# Altium PCB DHT11_PCB.PcbDoc
Units mm, origin at the board's own origin, x right, y up, seen from the top; angles counter-clockwise.
Board outline 40 x 18.5 mm, 2 copper layers (Top Layer, Bottom Layer), stack 1.571 mm thick; 5 components, 4 nets, 17 pads, 1 vias.
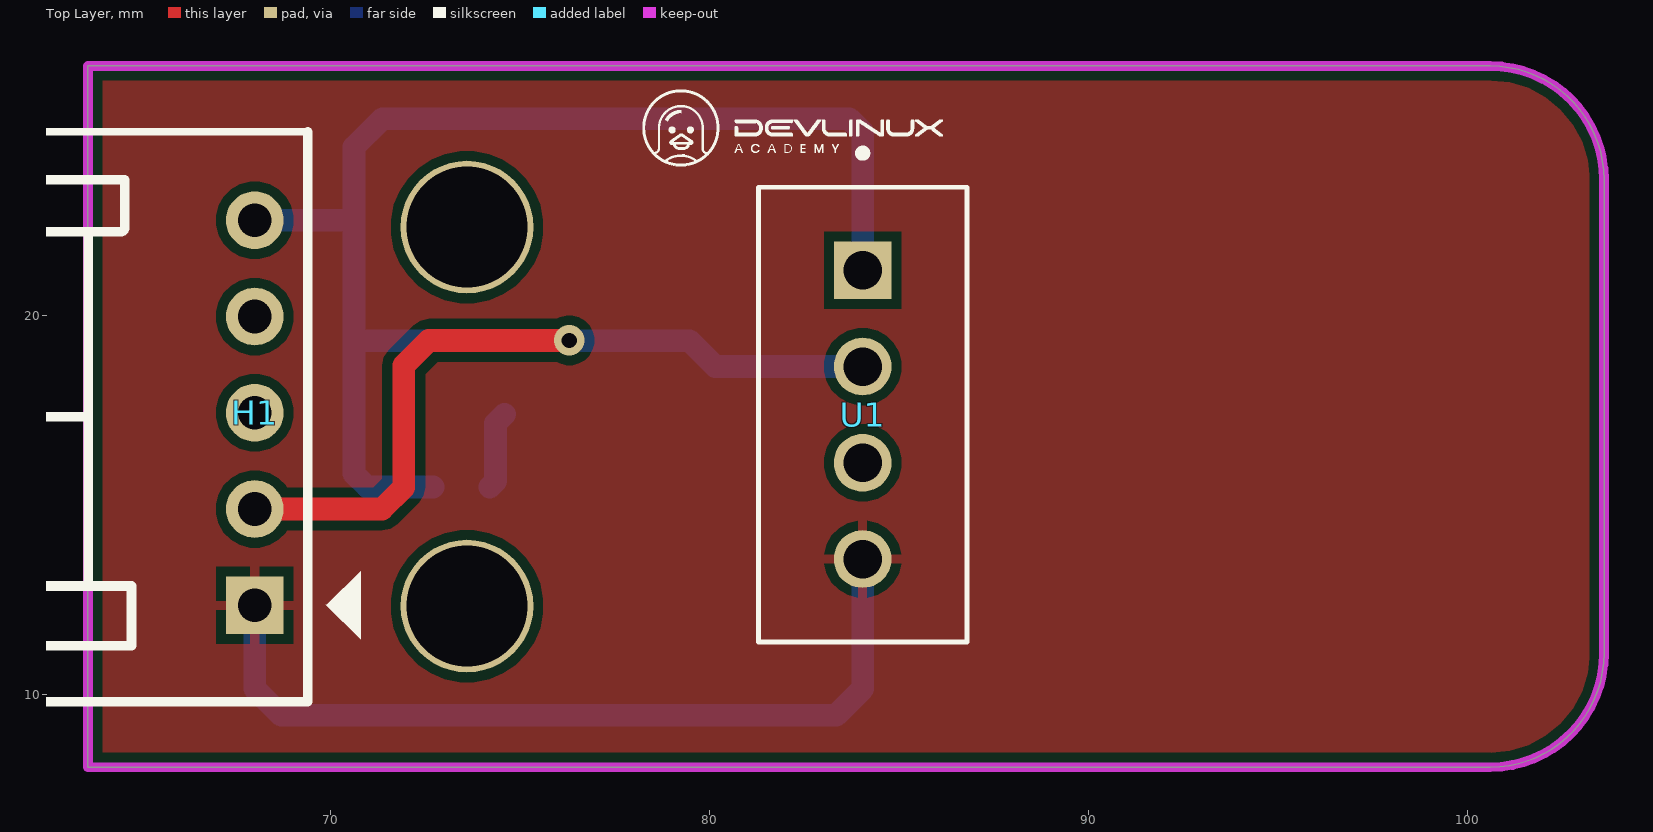
[diagram p0: Top Layer view]
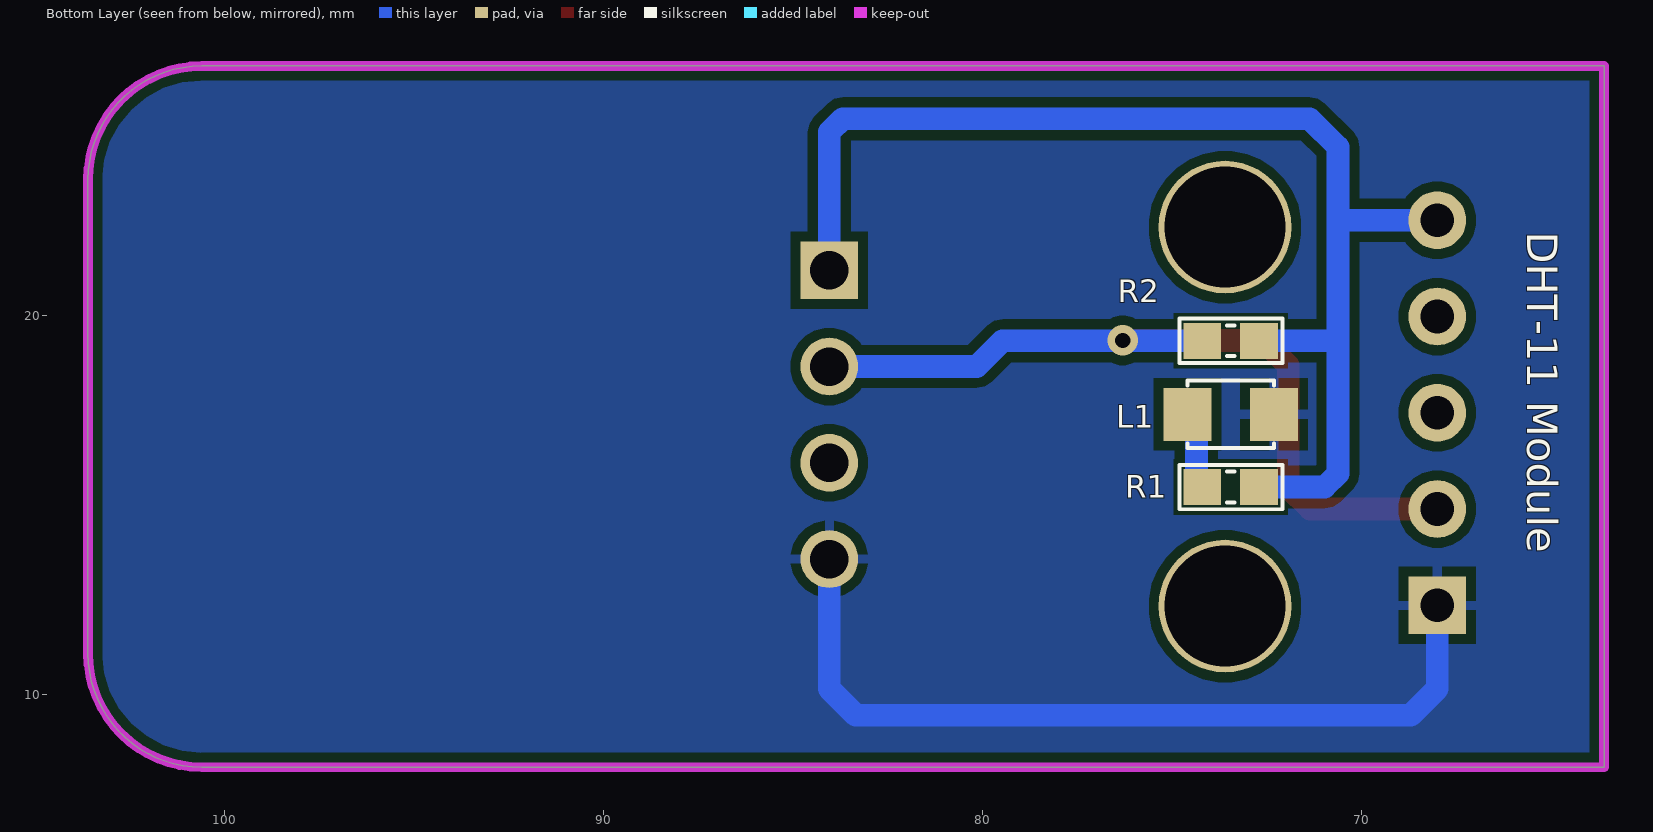
[diagram p1: Bottom Layer view, seen from below]
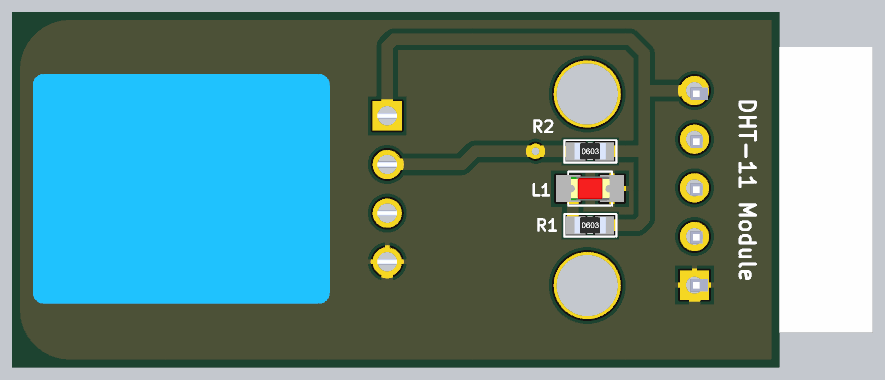
[diagram p2: 3D render of the assembled board from below, using the file's embedded part models]

## Layer stack, top to bottom
Top Solder: solder mask 0.0102, Solder Resist, Dk 3.5
Top Layer: signal copper 0.0356
Dielectric 1: dielectric 1.5, FR-4, Dk 4.8
Bottom Layer: signal copper 0.0356
Bottom Solder: solder mask 0.0102, Solder Resist, Dk 3.5

## Board outline
63.61,8.08 63.61,26.58 100.61,26.58 cw(c100.61,23.58) 103.61,23.58 103.61,11.08 cw(c100.61,11.08) 100.61,8.08

## Design rules (kind name [scope] priority, off if disabled: settings)
Clearance [All] p1: gap=0.254 ignorepadtopadclearanceinfootprint=FALSE except(0: Arc-Hole Track-Hole SMDPad-Hole THPad-Hole Via-Hole Fill-Hole Poly-Hole Region-Hole Text-Hole)
PolygonConnect [All] p1: connectstyle=Relief reliefconductorwidth=0.254 reliefentries=4 polygonreliefangle="90 Angle" airgapwidth=0.254
RoomDefinition DHT11_SCH [InComponentClass('DHT11_SCH')] p1: confinementstyle=ConfineIn formatcopy=TRUE lockcomponents=FALSE outline 164.363,-8.356 208.305,-8.356 208.305,18.06 164.363,18.06
RoutingVias [All] p1: holewidth=0.4 width=0.6 viastyle="Through Hole" minholewidth=0.3 minwidth=0.8 maxholewidth=0.5 maxwidth=1
SolderMaskExpansion [All] p1: expansion=0.102 istentingtop=FALSE
Width [All] p1: maxlimit=0.6 minlimit=0.254 preferedwidth=0.4
30 further rules are at their usual default settings.

## Components (designator, comment, footprint, x,y, rotation, side; value= is the part's Value field where it differs from the comment)
H1 "Header 5P 2.54 Duc Cong" "Header 5P DC 2.54" 68.01,12.35 r180 top
L1 "LED 0805" LED-0805-Red 74.6,17.39 r180 bottom
R1 "330" "tro smd 0603" 73.46,15.47 r180 bottom
R2 "10k" "tro smd 0603" 73.46,19.33 r180 bottom
U1 "DHT11" DHT11 84.05,17.38 r270 top

## Footprints (in the part's own frame and the unit in brackets; to place one, negate y for a bottom-side part, rotate by r counter-clockwise, add the part's x,y. Pads: shape width x height; smd on the part's side, far side on the other; paste and mask are expansions set on the pad)
DHT11 [mil]
  rect 60x60 hole 40: 1(-150,0)
  round 60 hole 40: 2(-50,0) 3(50,0) 4(150,0)
  silkscreen extent -276,-108 236,108, body extent -236,-197 236,728, height 108
"Header 5P DC 2.54" [mil]
  rect 60x60 hole 35: 1(0,0)
  round 60 hole 35: 2(0,-100) 3(0,-200) 4(0,-300) 5(0,-400)
  silkscreen extent -110,-492 232,100, body extent -87,-490 366,97, height 240
LED-0805-Red [mil]
  rect 50x55 smd: 1(0,0) 2(90,0)
  silkscreen extent 0,-35 90,35, body extent 5,-25 85,25, height 43
"tro smd 0603" [mm] "Chip Capacitor, 2-Leads, Body 1,60x0,80mm, IPC Medium Density"
  rect 1x0.95 smd mask+0.076: 1(-0.75,0) 2(0.75,0)
  silkscreen extent -1.35,-0.58 1.37,0.58, body extent -0.82,-0.42 0.82,0.43, height 0.44

## Part data
H1: "Cắm", Chung_Loai=Cắm, Don_Vi=Con, Ma_Hang=MH001308, Ten_Linh_Kien="Header 5P XH2.54-5P Đực Cong"
L1: library part "LED 0805 Do", "Dán", Chung_Loai=Dán, Don_Vi=Con, Ma_Hang=MH000897, Ten_Linh_Kien="LED 0805 Màu Đỏ (Red)"
R1 R2: library part "Tro 0603 1% 10k", "Dán", Chung_Loai=Dán, Don_Vi=Con, Ma_Hang=MH006333, So_Chan=2, Ten_Linh_Kien="Trở 0603 1% 10k"
U1: "DHT11 basic temperature-humidity sensor + extras", Package=None, Availability=Unavailable, MF="Adafruit Industries", MP=ADA386, Price=None, SnapEDA_Link=https://www.snapeda.com/parts/ADA386/Adafruit%20Industries/view-part/106068/?ref=snap

## Free pads (board coordinates)
  round 3.5 hole 3.2: 3(73.61,12.33) 3(73.61,22.33)

## Via types
v1: diameter 0.8, hole 0.4, Top Layer to Bottom Layer, 1 vias

## Nets (pads, with @x,y where several pads share a name; then routed paths per layer and width w, separated by ;. In a path a pad name is that pad's centre, name@x,y a point inside that pad or via, vN(x,y) a via of type N, cw(c..) or ccw(c..) an arc to the next point about the centre after c; other vN are vias at no path point)
+5: H1.5 R1.2 R2.2 U1.1 | length 33.1
  Bottom Layer w0.6: H1.5 70.63,22.51 ; R1.2 70.981,15.47 70.63,15.821 70.63,19.33 ; R2.2 70.63,19.33 ; U1.1 84.05,24.839 83.699,25.19 71.38,25.19 70.63,24.44 70.63,22.51 ; 70.63,19.33 70.63,22.51
DATA: H1.2 R2.1 U1.2 | length 22.2
  Top Layer w0.6: H1.2 71.37,14.89 71.94,15.46 71.94,18.68 72.6,19.34 v1(76.31,19.34)
  Bottom Layer w0.6: R2.1 79.48,19.33 80.16,18.65 U1.2
GND: H1.1 L1.2 U1.4 | length 22.2
  Bottom Layer w0.6: H1.1 68.01,10.15 68.71,9.45 83.35,9.45 84.05,10.15 U1.4
NetL1_1: L1.1 R1.1 | length 2.1
  Bottom Layer w0.6: R1.1 74.365,15.625 74.365,17.155 L1.1
pads on no net: H1.3 H1.4 U1.3

## Polygon pours and split planes (outlines as drawn)
GND on Top Layer "GND_L01_P001" (solid, remove dead copper, pour order 1): 53.941,37.596 116.864,37.596 118.73,35.73 115.23,32.23 115.23,-0.16 52.19,-0.16 49.16,-3.19
GND on Bottom Layer "GND_L02_P000" (solid, remove dead copper, pour order 0): 57.2,33.32 57.33,33.19 107.25,33.19 107.25,3.06 105.75,4.56 57.86,4.56

## Keep-outs
Keep-Out Layer:
  lines w0.254: 55.45,-35.18 55.55,-35.28 ; 63.61,8.08 100.61,8.08 ccw(c100.61,11.08) 103.61,11.08 103.61,23.58 ccw(c100.61,23.58) 100.61,26.58 63.61,26.58 63.61,8.08

## Silkscreen, mask and mechanical layers (free items; w line width, h text height)
Top Overlay:
  drawing of 21 lines, arcs and shapes, not listed
Bottom Overlay:
  text "DHT-11 Module" at 65.64,22.2 h0.8 r90